# Altium PCB STM32F4Front.PcbDoc
Units mm, origin at the board's own origin, x right, y up, seen from the top; angles counter-clockwise.
Board outline 116.54 x 91.29 mm, 2 copper layers (Top Layer, Bottom Layer); 68 components, 51 nets, 305 pads, 93 vias.
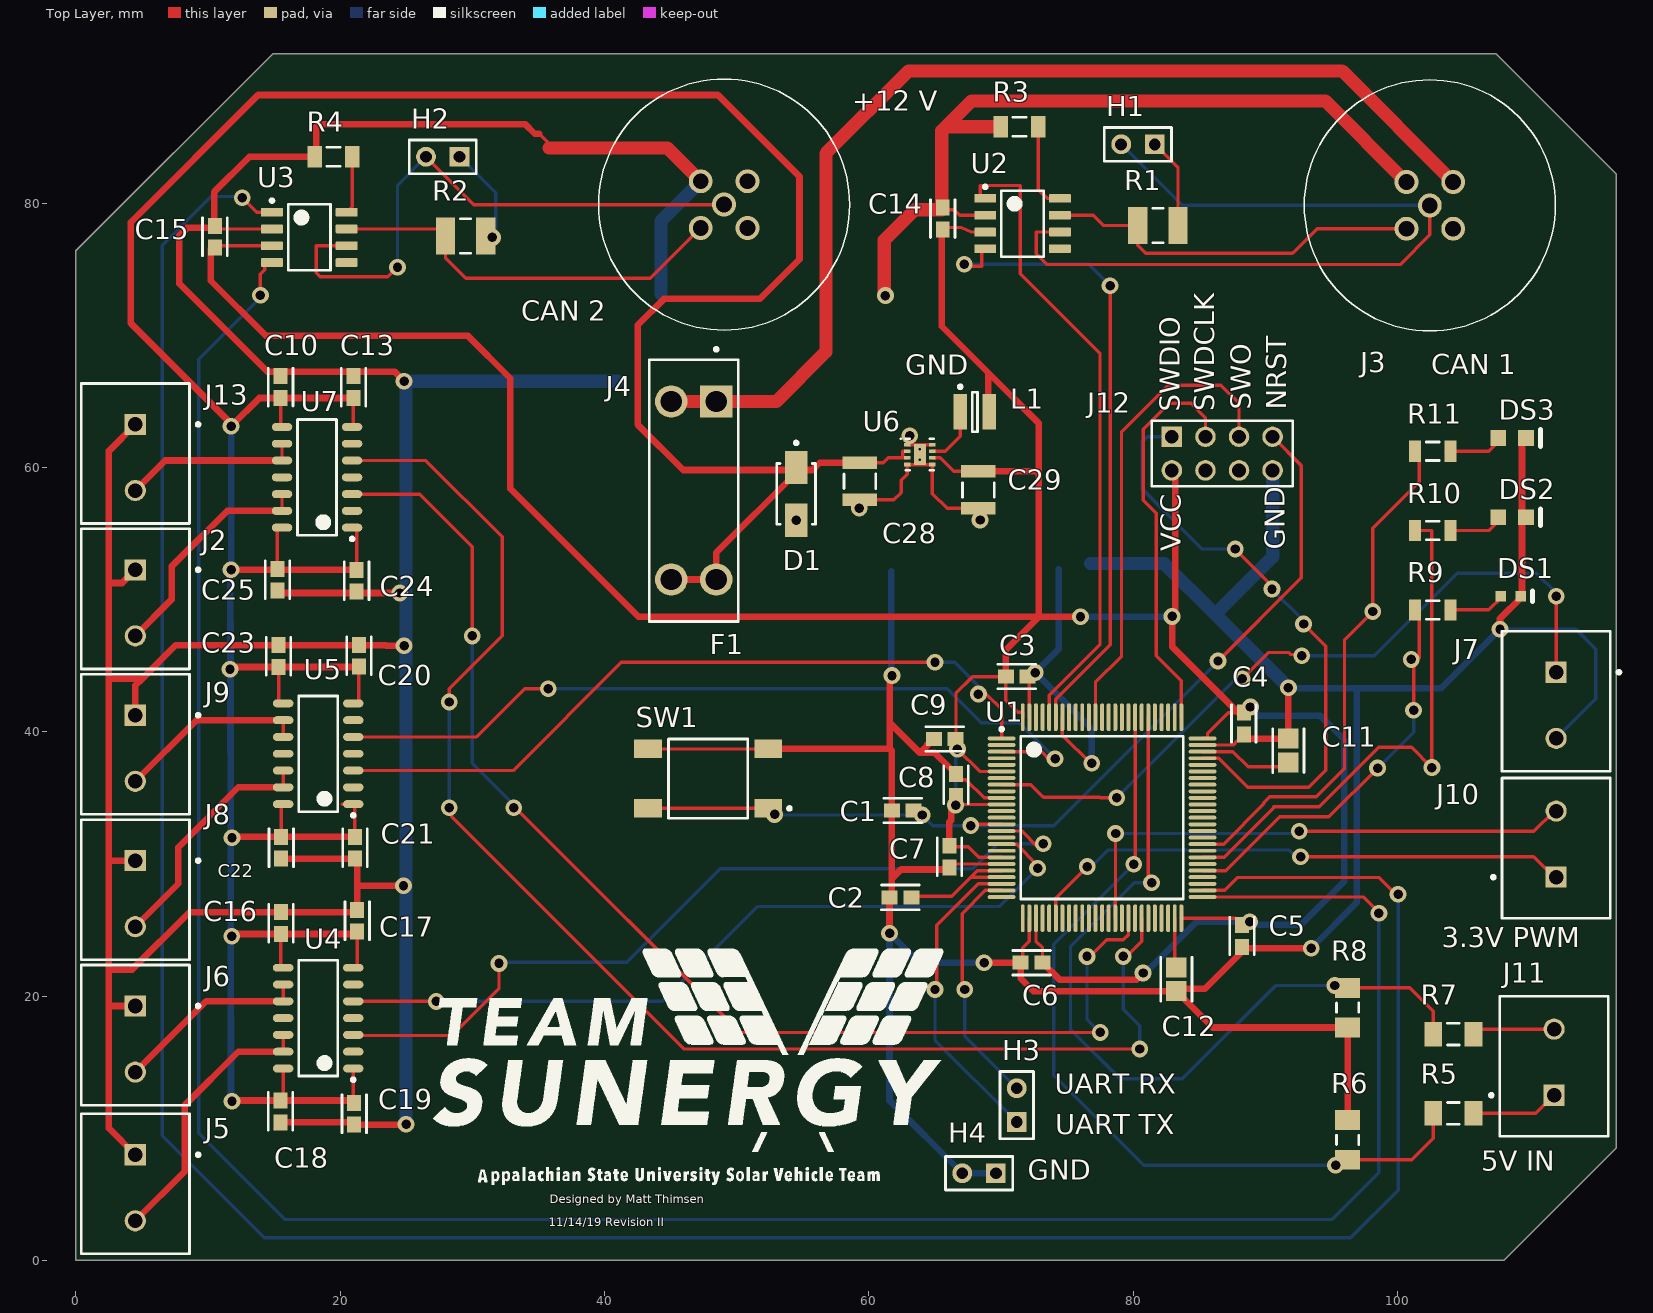
[diagram p0: Top Layer view]
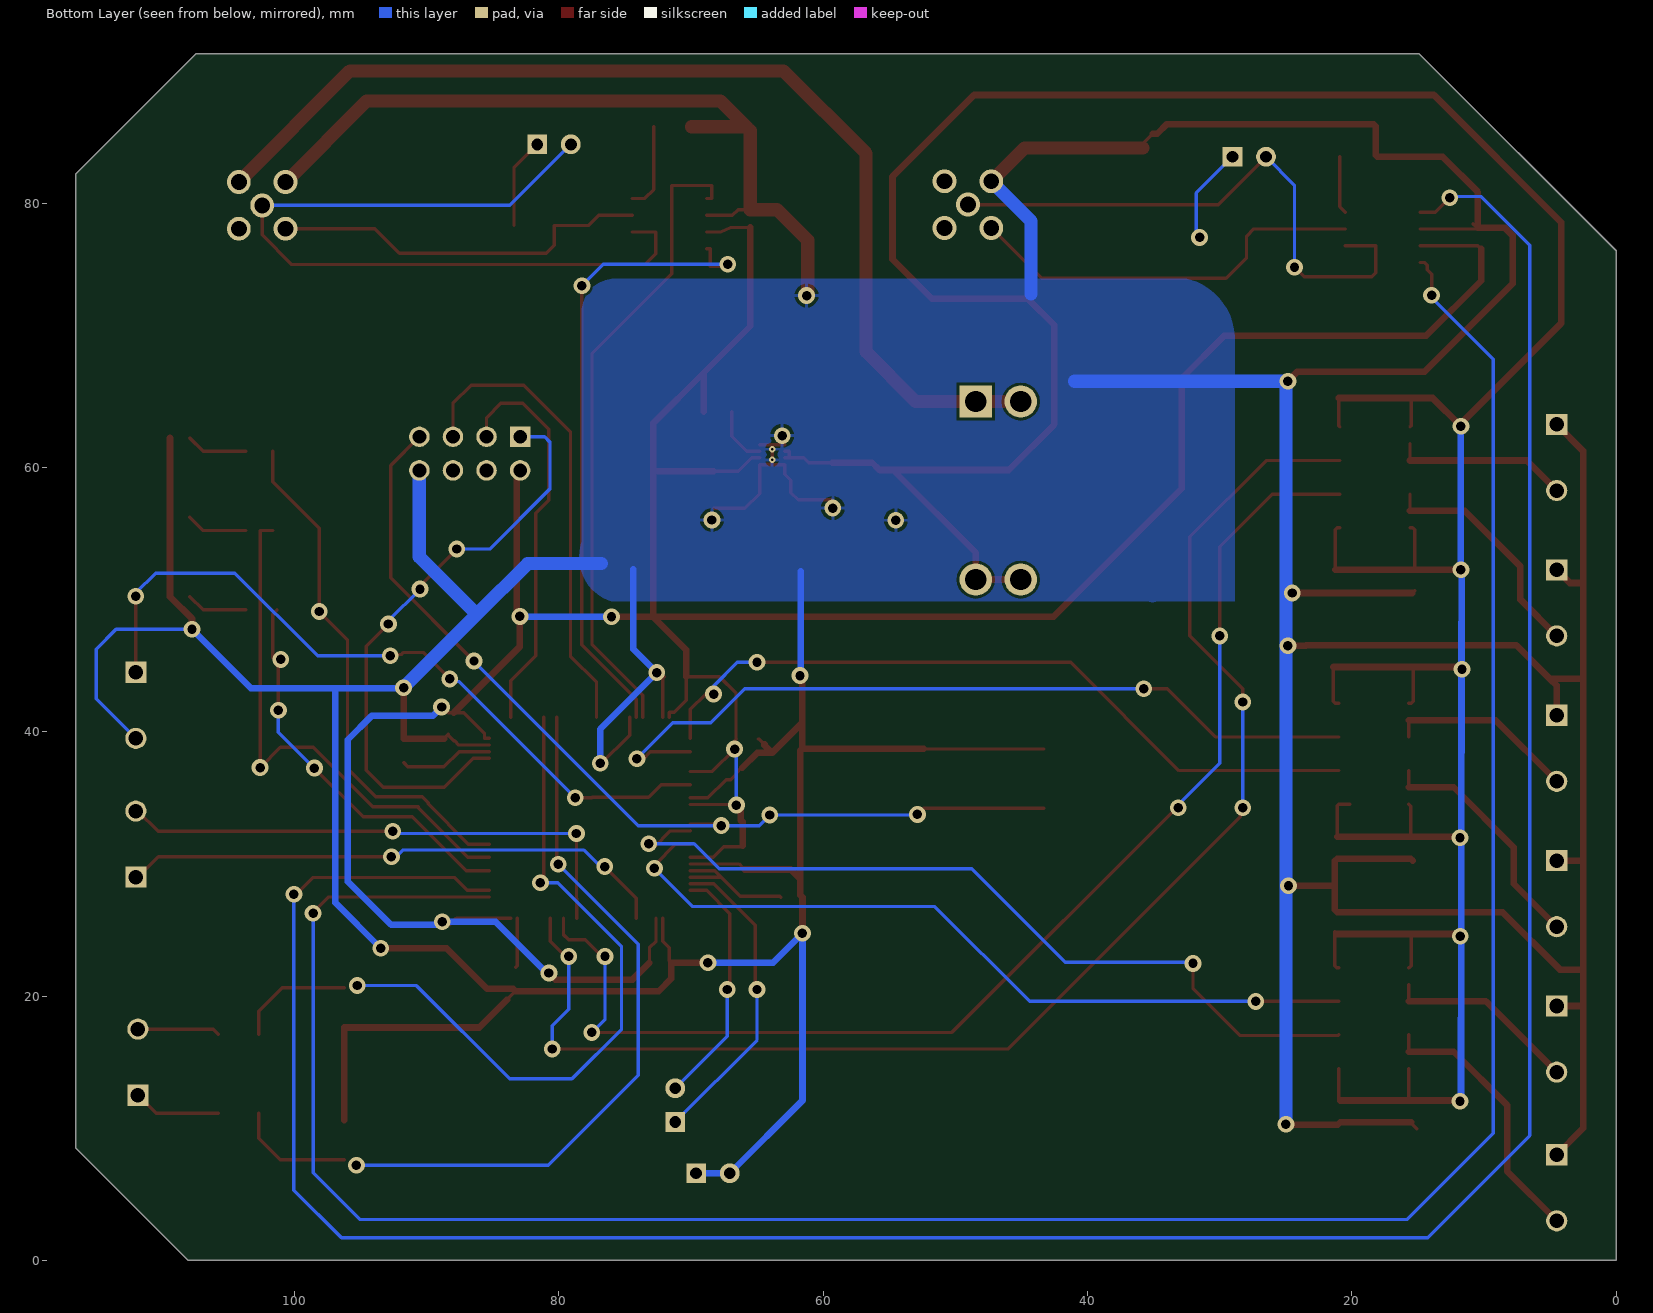
[diagram p1: Bottom Layer view, seen from below]

## Layer stack, top to bottom
Top Solder: solder mask 0.0102, Solder Resist, Dk 3.5
Top Layer: signal copper 0.0356
Dielectric 1: dielectric 0.32, FR-4, Dk 4.8
Bottom Layer: signal copper 0.0356
Bottom Solder: solder mask 0.0102, Solder Resist, Dk 3.5

## Board outline
108.059,0.018 0,0.001 0,76.396 14.924,91.29 107.448,91.29 116.54,82.199 116.54,8.499

## Design rules (kind name [scope] priority, off if disabled: settings)
Clearance [All] p1: gap=0.2 ignorepadtopadclearanceinfootprint=TRUE except(0: Arc-Hole Track-Hole SMDPad-Hole THPad-Hole Via-Hole Fill-Hole Poly-Hole Region-Hole Text-Hole)
MinimumSolderMaskSliver MinimumSolderMaskSliver_1 [HasFootprint('DSG8-1600X900TP') vs HasFootprint('DSG8-1600X900TP')] p1: minsoldermaskwidth=0
MinimumSolderMaskSliver [All] p2: minsoldermaskwidth=0.2
PolygonConnect [All] p1: connectstyle=Relief reliefconductorwidth=0.254 reliefentries=4 polygonreliefangle="90 Angle" airgapwidth=0.254
RoutingVias [All] p1: holewidth=0.711 width=1.27 viastyle="Through Hole" minholewidth=0.711 minwidth=1.27 maxholewidth=0.711 maxwidth=1.27
SilkToSolderMaskClearance [IsPad] p1: minsilkscreentomaskgap=0.2 clearancetoexposedcopper=TRUE
SolderMaskExpansion [All] p1: expansion=0.102
Width [All] p1: maxlimit=1 minlimit=0.254 preferedwidth=0.254 minimp=50.000000 maximp=50.000000 favimp=50.000000
28 further rules are at their usual default settings.

## Classes and differential pairs
component class User_LEDs: DS1 DS2 DS3 R9 R10 R11
component class Power_Supply: C28 C29 L1 U6
component class MCU: C1 "C1 0.1 uF" C2 C3 C4 C5 "C5 100nF" C6 "C6 100nF" C7 "C7 100nF" C8 "C8 0.1uF" C9 "C9 0.1uF" "C10 0.1uF" C11 C12 SW1 U1
component class Communications: C14 C15 D1 F1 H1 H2 H3 H4 J4 J12 R1 R2 R3 R4 U2 U3
component class 12v_Outputs: C10 C13 C16 C17 C18 C19 C20 C21 C22 C23 C24 C25 J2 J5 J6 J7 J8 J9 J10 J13 U4 U5 U7
component class 5v_Inputs: J11 R5 R6 R7 R8

## Components (designator, comment, footprint, x,y, rotation, side; value= is the part's Value field where it differs from the comment)
C1 "100nF" Kemet_C0603_IPC_A 62.565,34.049 r180 top
C2 "100nF" Kemet_C0603_IPC_A 62.39,27.474 r0 top
C3 "100nF" Kemet_C0603_IPC_A 71.19,44.174 r0 top
C4 "100nF" Kemet_C0603_IPC_A 88.365,40.624 r270 top
C5 "100nF" Kemet_C0603_IPC_A 88.24,24.549 r270 top
C6 "100nF" Kemet_C0603_IPC_A 72.315,22.524 r0 top
C7 "100nF" Kemet_C0603_IPC_A 66.09,30.549 r90 top
C8 "100nF" Kemet_C0603_IPC_A 66.59,35.974 r270 top
C9 "100nF" Kemet_C0603_IPC_A 65.74,39.449 r0 top
C10 "100nF" Kemet_C0603_IPC_A 15.5,66.076 r90 top
C11 "2.2uF" Yageo_CC0805-0.85_IPC_A 91.74,38.574 r270 top
C12 "2.2uF" Yageo_CC0805-0.85_IPC_A 83.265,21.274 r90 top
C13 "100nF" Kemet_C0603_IPC_A 21,66.076 r90 top
C14 "100nF" Kemet_C0603_IPC_A 65.59,78.824 r90 top
C15 "100nF" Kemet_C0603_IPC_A 10.515,77.449 r90 top
C16 "100nF" Kemet_C0603_IPC_A 15.515,25.524 r90 top
C17 "100nF" Kemet_C0603_IPC_A 21.29,25.699 r90 top
C18 "100nF" Kemet_C0603_IPC_A 15.49,11.274 r270 top
C19 "100nF" Kemet_C0603_IPC_A 21.065,11.099 r270 top
C20 "100nF" Kemet_C0603_IPC_A 21.415,45.749 r90 top
C21 "100nF" Kemet_C0603_IPC_A 21.115,31.224 r270 top
C22 "100nF" Kemet_C0603_IPC_A 15.54,31.224 r270 top
C23 "100nF" Kemet_C0603_IPC_A 15.34,45.724 r90 top
C24 "100nF" Kemet_C0603_IPC_A 21.25,51.424 r270 top
C25 "100nF" Kemet_C0603_IPC_A 15.25,51.5 r270 top
C28 "CAP 22uF 16V X7R 1210(3225)" CAPC1210(3225)280_L 59.315,58.949 r90 top value=22uF
C29 "CAP 22uF 16V X7R 1210(3225)" CAPC1210(3225)280_L 68.28,58.299 r90 top value=22uF
D1 "S1J-13-F" Diodes_SMA_0 54.5,58 r270 top
DS1 "HSMS-C190" AVAG-HSMX-C190_V 108.565,50.249 r0 top
DS2 "HSMD-C170" AVAG-HSMX-C170_V 108.665,56.224 r0 top
DS3 "HSMG-C170" AVAG-HSMX-C170_V 108.665,62.224 r0 top
F1 "3557-2" Keystone_3557-2_0 46.75,58.25 r270 top
H1 "Header 0" HDR1X2 81.629,84.444 r180 top
H2 "Header 0" HDR1X2 29.03,83.499 r180 top
H3 "Header 0" HDR1X2 71.19,10.484 r90 top
H4 "Header 0" HDR1X2 69.605,6.599 r180 top
J2 "282836-2" TECO-282836-2_V 4.5,49.75 r270 top
J3 "1542761" 1542761 102.44,79.824 r135 top
J4 "1542761" 1542761 49.047,79.881 r135 top
J5 "282836-2" TECO-282836-2_V 4.5,5.5 r270 top
J6 "282836-2" TECO-282836-2_V 4.5,16.75 r270 top
J7 "282836-2" TECO-282836-2_V 112,42 r270 top
J8 "282836-2" TECO-282836-2_V 4.5,27.75 r270 top
J9 "282836-2" TECO-282836-2_V 4.5,38.75 r270 top
J10 "282836-2" TECO-282836-2_V 112,31.5 r90 top
J11 "282836-2" TECO-282836-2_V 111.84,14.999 r90 top
J12 "SSW-104-02-T-D" SMTC-SSW-104-02-X-D 82.925,62.314 r0 top
J13 "282836-2" TECO-282836-2_V 4.5,60.75 r270 top
L1 "SRN3015-2R2M" BOUR-SRN3015-2_V 68.015,64.199 r0 top
R1 "ERJ-14YJ121U" RESC3225X70X50ML20T20 81.865,78.299 r0 top
R2 "ERJ-14YJ121U" RESC3225X70X50ML20T20 29.49,77.499 r0 top
R3 "ERJ-8GEYJ103V" RESC3216X70X50NL05T20 71.39,85.774 r180 top
R4 "ERJ-8GEYJ103V" RESC3216X70X50NL05T20 19.49,83.499 r180 top
R5 "4.7 kOhm" RESC3216X60X45ML15T20 104.226,11.124 r180 top
R6 "ERA8AEB912V" RESC3216X70X50ML20T25 96.226,9.124 r270 top
R7 "4.7 kOhm" RESC3216X60X45ML15T20 104.226,17.124 r180 top
R8 "ERA8AEB912V" RESC3216X70X50ML20T25 96.226,19.124 r270 top
R9 "CRCW120656R0FKEA" RESC3216X60X45LL10T20 102.665,49.224 r180 top
R10 "CRCW120656R0FKEA" RESC3216X60X45LL10T20 102.665,55.224 r180 top
R11 "CRCW120656R0FKEA" RESC3216X60X45LL10T20 102.665,61.224 r180 top
SW1 "TL3301AF260QG" ESWI-TL3301AF260QG_V 47.84,36.449 r180 top
U1 "STM32F407VGT6" STM-LQFP100_M 77.643,33.496 r0 top
U2 "SN65HVD230D" D0008A_M 71.629,78.444 r0 top
U3 "SN65HVD230D" D0008A_M 17.665,77.404 r0 top
U4 "BTS4160DGA" INF-PG-DSO-14-37_N 18.34,18.334 r180 top
U5 "BTS4160DGA" INF-PG-DSO-14-37_N 18.34,38.334 r180 top
U6 "TPS62172DSGR" DSG8-1600X900TP 63.856,60.971 r0 top
U7 "BTS4160DGA" INF-PG-DSO-14-37_N 18.25,59.25 r180 top

## Footprints (in the part's own frame and the unit in brackets; to place one, negate y for a bottom-side part, rotate by r counter-clockwise, add the part's x,y. Pads: shape width x height; smd on the part's side, far side on the other; paste and mask are expansions set on the pad)
1542761 [mm]
  round 1.8 hole 1.2: 1(-2.5,0) 2(0,-2.5) 3(2.5,0) 4(0,2.5) 5(0,0)
  silkscreen extent -9.5,-9.5 9.5,9.5
AVAG-HSMX-C170_V [mm] "SMD, 2-Leads, Body 2x1.25mm, Height 0.8mm"
  rect 1.2x1.2 smd: 1(-1.05,0) 2(1.05,0)
  silkscreen extent 2.15,-0.63 2.15,0.63, body extent -1,-0.63 1,0.63, height 0.8
AVAG-HSMX-C190_V [mm] "SMD, 2-Leads, Body 1.6x0.8mm, Height 0.9mm"
  rect 0.8x0.8 smd: 1(-0.75,0) 2(0.75,0)
  silkscreen extent 1.65,-0.4 1.65,0.4, body extent -0.8,-0.4 0.8,0.4, height 0.9
BOUR-SRN3015-2_V [mm] "SMD, 2-Leads, Body 3x3mm, Height 1.5mm"
  rect 1x2.7 smd: 1(-1.1,0) 2(1.1,0)
  silkscreen extent -1.22,-1.5 0.2,2.02, body extent -1.5,-1.5 1.5,1.5, height 1.5
CAPC1210(3225)280_L [mm] "Chip Capacitor, Body 3.2x2.5mm, Height 2.8mm, IPC High Density"
  rect 0.95x2.6 smd: 1(-1.4,0) 2(1.4,0)
  silkscreen extent -0.55,-1.2 0.55,1.2, body extent -1.7,-1.4 1.7,1.4, height 2.8
D0008A_M [mm] "SOIC, 8-Leads, Body 5x4mm, Pitch 1.27mm, IPC Low Density"
  rrect15% 1.65x0.65 smd: 1(-2.825,1.905) 2(-2.825,0.635) 3(-2.825,-0.635) 4(-2.825,-1.905) 5(2.825,-1.905) 6(2.825,-0.635) 7(2.825,0.635) 8(2.825,1.905)
  silkscreen extent -2.95,-2.5 1.6,2.9, body extent -3,-2.45 3,2.45, height 1.63
Diodes_SMA_0 [mm]
  rect 2.5x1.7 smd paste+0 mask+0: 1(-2,0) 2(2,0)
  silkscreen extent -3.97,-1.46 2.3,1.46, body extent -3.35,-1.56 3.35,1.56, height 0.25
DSG8-1600X900TP [mm] "SON, 8-Leads, Body 2x2mm, Pitch 0.5mm, Thermal Pad 1.6x0.9mm, TI Recommended"
  rect 0.5x0.28 smd paste-0.14 mask+0.07: 1(-0.95,0.75) 2(-0.95,0.25) 3(-0.95,-0.25) 4(-0.95,-0.75) 5(0.95,-0.75) 6(0.95,-0.25) 7(0.95,0.25) 8(0.95,0.75)
  rect 0.9x1.6 smd paste-0.45 mask+0.07: 9(0,0)
  silkscreen extent -1.5,-1.2 1.05,1.25, body extent -1.05,-1.05 1.05,1.05, height 0.8
ESWI-TL3301AF260QG_V [mm] "SMD, 4-Leads, Body 6x6mm"
  rect 2.1x1.4 smd: 1(-4.55,2.25) 2(4.55,2.25) 3(-4.55,-2.25) 4(4.55,-2.25)
  silkscreen extent -6.27,-3 3,3, body extent -3,-3 3,3, height 5.3
HDR1X2 [mm] "Connector; Header; 2 Position"
  rect 1.5x1.5 hole 0.9: 1(0,0)
  round 1.5 hole 0.9: 2(2.54,0)
  silkscreen extent -1.27,-1.27 3.81,1.27
INF-PG-DSO-14-37_N [mm] "SOP, 14-Leads, Body 8.65x3.9mm, Pitch 1.27mm, IPC Medium Density"
  oval 1.55x0.6 smd: 1(-2.65,3.81) 2(-2.65,2.54) 3(-2.65,1.27) 4(-2.65,0) 5(-2.65,-1.27) 6(-2.65,-2.54) 7(-2.65,-3.81) 8(2.65,-3.81) 9(2.65,-2.54) 10(2.65,-1.27) 11(2.65,0) 12(2.65,1.27) 13(2.65,2.54) 14(2.65,3.81)
  silkscreen extent -2.78,-4.37 1.47,4.78, body extent -2,-4.38 2,4.38, height 1.75
Kemet_C0603_IPC_A [mm]
  rect 1.206x1.058 smd paste+0 mask+0: 1(-0.826,0) 2(0.826,0)
  silkscreen extent -1.43,-0.93 1.43,0.93
Keystone_3557-2_0 [mm]
  rect 2.45x2.45 hole 1.6 paste-1000 mask+0: 1(-6.735,1.7)
  round 2.45 hole 1.6 paste-1000 mask+0: 2(6.735,1.7) 3(-6.735,-1.7) 4(6.735,-1.7)
  silkscreen extent -10.8,-3.36 9.9,3.36, body extent -10.08,-3.54 10.08,3.54, height 0.25
RESC3216X60X45LL10T20 [mm] "Chip Resistor, 2-Leads, Body 3.20x1.60mm, IPC High Density"
  rect 0.9x1.6 smd: 1(-1.35,0) 2(1.35,0)
  silkscreen extent -0.5,-0.7 0.5,0.7, body extent -1.65,-0.85 1.65,0.85, height 0.6
RESC3216X60X45ML15T20 [mm] "Chip Resistor, 2-Leads, Body 3.3x1.75mm, IPC Low Density"
  rect 1.35x1.85 smd: 1(-1.525,0) 2(1.525,0)
  silkscreen extent -0.45,-0.83 0.45,0.82, body extent -1.65,-0.87 1.65,0.87, height 0.6
RESC3216X70X50ML20T25 [mm] "Chip Resistor, 2-Leads, Body 3.20x1.60mm, IPC Low Density"
  rect 1.5x1.9 smd: 1(-1.5,0) 2(1.5,0)
  silkscreen extent -0.35,-0.85 0.35,0.85, body extent -1.7,-0.9 1.7,0.9, height 0.7
RESC3216X70X50NL05T20 [mm] "Chip Resistor, 2-Leads, Body 3.20x1.60mm, IPC Medium Density"
  rect 1.1x1.65 smd: 1(-1.425,0) 2(1.425,0)
  silkscreen extent -0.5,-0.73 0.5,0.73, body extent -1.63,-0.82 1.62,0.82, height 0.7
RESC3225X70X50ML20T20 [mm] "Chip Resistor, 2-Leads, Body 3.20x2.50mm, IPC Low Density"
  rect 1.45x2.8 smd: 1(-1.525,0) 2(1.525,0)
  silkscreen extent -0.4,-1.3 0.4,1.3, body extent -1.7,-1.35 1.7,1.35, height 0.7
SMTC-SSW-104-02-X-D [mm] "SQ Post Socket, 2x4 Pins, Vertical, 2.54mm Pitch, Female"
  rect 1.55x1.55 hole 1.04: 1(0,0)
  round 1.55 hole 1.04: 2(0,-2.54) 3(2.54,0) 4(2.54,-2.54) 5(5.08,0) 6(5.08,-2.54) 7(7.62,0) 8(7.62,-2.54)
  silkscreen extent -1.53,-3.74 9.15,1.2, body extent -1.52,-3.75 9.14,1.21, height 8.51
STM-LQFP100_M [mm] "Thin QFP, 100-Leads, Body 14x14mm, Pitch 0.5mm, IPC Low Density"
  oval 2.1x0.3 smd: 1(-7.6,6) 2(-7.6,5.5) 3(-7.6,5) 4(-7.6,4.5) 5(-7.6,4) 6(-7.6,3.5) 7(-7.6,3) 8(-7.6,2.5) 9(-7.6,2) 10(-7.6,1.5) 11(-7.6,1) 12(-7.6,0.5) 13(-7.6,0) 14(-7.6,-0.5) 15(-7.6,-1) 16(-7.6,-1.5) 17(-7.6,-2) 18(-7.6,-2.5) 19(-7.6,-3) 20(-7.6,-3.5) 21(-7.6,-4) 22(-7.6,-4.5) 23(-7.6,-5) 24(-7.6,-5.5) 25(-7.6,-6) 51(7.6,-6) 52(7.6,-5.5) 53(7.6,-5) 54(7.6,-4.5) 55(7.6,-4) 56(7.6,-3.5) 57(7.6,-3) 58(7.6,-2.5) 59(7.6,-2) 60(7.6,-1.5) 61(7.6,-1) 62(7.6,-0.5) 63(7.6,0) 64(7.6,0.5) 65(7.6,1) 66(7.6,1.5) 67(7.6,2) 68(7.6,2.5) 69(7.6,3) 70(7.6,3.5) 71(7.6,4) 72(7.6,4.5) 73(7.6,5) 74(7.6,5.5) 75(7.6,6)
  oval 0.3x2.1 smd: 26(-6,-7.6) 27(-5.5,-7.6) 28(-5,-7.6) 29(-4.5,-7.6) 30(-4,-7.6) 31(-3.5,-7.6) 32(-3,-7.6) 33(-2.5,-7.6) 34(-2,-7.6) 35(-1.5,-7.6) 36(-1,-7.6) 37(-0.5,-7.6) 38(0,-7.6) 39(0.5,-7.6) 40(1,-7.6) 41(1.5,-7.6) 42(2,-7.6) 43(2.5,-7.6) 44(3,-7.6) 45(3.5,-7.6) 46(4,-7.6) 47(4.5,-7.6) 48(5,-7.6) 49(5.5,-7.6) 50(6,-7.6) 76(6,7.6) 77(5.5,7.6) 78(5,7.6) 79(4.5,7.6) 80(4,7.6) 81(3.5,7.6) 82(3,7.6) 83(2.5,7.6) 84(2,7.6) 85(1.5,7.6) 86(1,7.6) 87(0.5,7.6) 88(0,7.6) 89(-0.5,7.6) 90(-1,7.6) 91(-1.5,7.6) 92(-2,7.6) 93(-2.5,7.6) 94(-3,7.6) 95(-3.5,7.6) 96(-4,7.6) 97(-4.5,7.6) 98(-5,7.6) 99(-5.5,7.6) 100(-6,7.6)
  silkscreen extent -7.72,-6.15 6.15,6.82, body extent -7,-7 7,7, height 1.6
TECO-282836-2_V [mm] "Female Header, Pitch 5mm, 1 x 2 Position, Height 10mm"
  rect 1.6x1.6 hole 1.1: 1(-2.5,0)
  round 1.6 hole 1.1: 2(2.5,0)
  silkscreen extent -5.6,-4.1 5,4.88, body extent -5.6,-4.1 5,4.1, height 10
Yageo_CC0805-0.85_IPC_A [mm]
  rect 1.505x1.556 smd paste+0 mask+0: 1(-0.901,0) 2(0.901,0)
  silkscreen extent -1.65,-1.18 1.65,1.18, body extent -2.15,-1.28 2.15,1.28, height 0.25

## Part data
C1 C2 C3 C4 C5 C6 C7 C8 C9 C10 C13 C14 C15 C16 C17 C18 C19 C20 C21 C22 C23 C24 C25: library part C0603C104K5RACTU, "CAP CER 0.1UF 100NF 50V X7R 0603 C0603C104K5RACTU"
C11 C12: library part CC0805KKX7R6BB225, "2.2UF CC0805KKX7R6BB225"
C28 C29: library part CMP-1038-02277-1, "CAP 22uF 16V ±10% 1210 (3225 Metric) Thickness 2.8mm SMD", Case-EIA=1210, Case-Metric=3225, Rated Voltage="16 V", Tolerance=±10%, Max Thickness="2.8 mm", Technology=SMT
DS1: library part CMP-2000-06427-1, "LED Uni-Color Red, 52 mW, 20 mA, -40 to 85 degC, 2-Pin SMD, RoHS, Tape and Reel", Emitting Color=Red, Forward Current=25mA, Forward Voltage=2.6V, Manufacturer=Avago, Operating Temperature Classification=Industrial, Operating Temp Range=-40Cto85C, Package Description="2-Pin Surface Mount Device, Body 1.6 x 0.8 mm, Height 0.9 mm", Package Reference=HSMX-C190, Package Type=ChipLed, Power Dissipation=52W, Reverse Voltage=5V, Test Current (It)=20mA, Chip Material=GaP, Datasheet URL=http://docs.avagotech.com/docs/AV02-0551EN, Datasheet Version=03/2012, DELETED=Compliant, Dominant Wave Length=626nm, High Brightness=No, Lens Dimensions=1x0.8x0.5mm, Lens Type=ColorlessDiffused, Luminous Intensity=10mcd, Lum Intensity=10mcd, Main Category=ChipLED, Manufacturer URL=http://www.avagotech.com/, Mounting=SurfaceMount, Mounting Technology=SurfaceMount, Number of  Elements=1, Packaging=TapeandReel, Peak Wavelength=630nm, Pin Count=2, Product Depth (mm)=0.8mm, Product Height (mm)=0.8mm, Product Length (mm)=1.6mm, Rad Hardened=No, Shape Type=Rectangular, Type=Uni-Color, Viewing Angle=170deg
DS2: library part CMP-2000-06421-1, "LED Uni-Color Orange, 52 mW, 20 mA, -40 to 85 degC, 2-Pin SMD, RoHS, Tape and Reel", Forward Current If=20mA, Forward Voltage=2.2V, LED Colour=Orange, Manufacturer=Avago, Operating Temperature Max=85°C, Operating Temperature Min=-30°C, Operating Temperature Range=-30°Cto+85°C, Opto Case Style=SMD, Package Description="2-Pin Surface Mount Device, Body 2 x 1.25 mm, Height 0.8 mm", Package Reference=HSMX-C170, Power Dissipation Pd=52mW, Storage Temperature Min=-40°C, Bulb Size=1.25mmx1.4mm, Datasheet URL=http://docs.avagotech.com/docs/AV02-0551EN, Datasheet Version=03/2012, Dominant Wavelength=604nm, External Depth=0.8mm, External Length / Height=2mm, External Width=1.25mm, Forward Current If Max=20mA, Forward Voltage VF Max=2.2V, LED Mounting=SMD, LED Type=Standard, Lens Shape=Rectangular, Light Area Height=1.25mm, Luminous Intensity=8mcd, Luminous Intensity Typ=8mcd, Manufacturer URL=http://www.avagotech.com/, Mounting Technology=SurfaceMount, Mounting Type=SMD, MSL=MSL2A-4weeks, No. of Pins=2, Opto Mounting Orientation=Top, Package / Case=SMD, Peak Forward Current=20mA, Peak Wavelength=605nm, PIV Max=5V, Storage Temperature Max=85°C, SVHC=NoSVHC(19-Dec-2012), Viewing Angle=170°, Voltage Vf Typ=2.2V, Wavelength Typ=605nm
DS3: library part CMP-2000-05062-1, "Chip LED, Green, 2.2 V, -40 to 85 degC, 2-Pin SMD, Pb-Free, Tape and Reel", Forward Current If=20mA, Forward Voltage=2.2V, Forward Voltage VF Max=2.6V, LED Colour=Green, Manufacturer=Avago, Operating Temperature Max=85degC, Operating Temperature Min=-30degC, Operating Temperature Range=-30degCto+85degC, Opto Case Style=SMD, Package Description="2-Pin Surface Mount Device, Body 2 x 1.25 mm, Height 0.8 mm", Package Reference=HSMX-C170, Storage Temperature Min=-40degC, Bulb Size=1.25mmx1.4mm, Datasheet URL=https://datasheet.ciiva.com/29280/180495-da-01-en-chip-led-hsmg-c170-gelb-gruen-29280971.pdf, Datasheet Version=Oct-08, Dominant Wavelength=572nm, Dominant Wavelength Typ=572nm, External Depth=0.8mm, External Length / Height=2mm, External Width=1.25mm, Forward Current If Max=20mA, LED Mounting=SMD, LED Type=Standard, Lens Shape=Rectangular, Light Area Height=1mm, Luminous Intensity=15mcd, Luminous Intensity Min=4mcd, Luminous Intensity Typ=15mcd, Manufacturer URL=http://www.avagotech.com/, Mounting Type=SMD, MSL=MSL2A-4weeks, No. of Pins=2, Opto Mounting Orientation=Top, Packaging=CutTape, Peak Forward Current=20mA, Peak Wavelength=570nm, PIV Max=5V, Storage Temperature Max=85degC, SVHC=NoSVHC(16-Jun-2014), Viewing Angle=170deg, Voltage Vf Typ=2.2V, Wavelength Typ=570nm
H1 H2 H3 H4: library part "Header 2", "Header, 2-Pin", LatestRevisionDate=17-Jul-2002, LatestRevisionNote="Re-released for DXP Platform.", Publisher="Altium Limited"
J2 J5 J6 J7 J8 J9 J10 J11 J13: library part CMP-1684-00017-1, "Female Header, Pitch 5 mm, 1 x 2 Position, Height 10 mm, Tail Length 3.5 mm, Rohs, Bulk", Color=Green, Current=13.5A, Manufacturer="TE Connectivity", Package Description="Female Header, Pitch 5 mm, 1 x 2 Position, Height 10 mm, Tail Length 3.5 mm", Package Reference=THD, Standard Package=300, Voltage=300V, 3D Model=282836-2.pdf, Category=Connectors,Interconnects, Clamp Material - Plating=Brass-NickelPlated, Contact Material - Plating=Brass-TinPlated, Datasheet URL=http://www.te.com.cn/commerce/DocumentDelivery/DDEController?Action=showdoc&DocId=Catalog+Section%7F1308389_EUROSTYLE_TERMINAL_BLOCKS%7F0607%7Fpdf%7FEnglish%7FENG_CS_1308389_EUROSTYLE_TERMINAL_BLOCKS_0607.pdf%7F282836-2, Dynamic Catalog=BuchananSeries, Family=TerminalBlocks-WiretoBoard, Featured Product=EurostyleTerminalBlockConnectors, Features=Interlocking(Side), Housing Material=Polyamide(PA66),Nylon6/6, Manufacturer URL=http://www.te.com, Mating Orientation=HorizontalwithBoard, Mounting Type=ThroughHole, Number of Levels=1, Other Names="5ULV-02B / A98076", Packaging=Bulk, Pitch="0.197\"(5.00mm)", Positions Per Level=2, Product Training Modules=Wire-to-BoardEurostyleTerminalBlocks, RoHS Information=282836-2StatementofCompliance, Screw Material - Plating=Brass-NickelPlated, Screw Thread=M3, Series=Buchanan, Torque - Screw=0.68Nm(6Lb-In), Wire Gauge=16-30AWG, Wire Termination=Screw-RisingCageClamp
J3 J4: "Connector", Manufacturer_Name="Phoenix Contact", Mouser Part Number=651-1542761, RS Part Number=8025583, Allied_Number=70170366, Allied Price/Stock=https://www.alliedelec.com/phoenixcontact-1542761/70170366/, Datasheet Link=https://media.digikey.com/PDF/Data%20Sheets/Phoenix%20Contact%20PDFs/1542761.pdf, Height=18mm, Manufacturer_Part_Number=1542761, Mouser Price/Stock=https://www.mouser.com/Search/Refine.aspx?Keyword=651-1542761, RS Price/Stock=http://uk.rs-online.com/web/p/products/8025583
J12: library part CMP-1023-00342-1, "SQ Post Socket, Through-hole, Vertical, -55 to 105 degC, 2.54mm Pitch, 8-Pin, Female, RoHS", Manufacturer=Samtec, Temperature Range="-55 to 105 degC", ComponentLink1Description="Manufacturer URL", ComponentLink1URL=http://www.samtec.com, ComponentLink2Description=Datasheet, ComponentLink2URL=http://www.samtec.com/documents/webfiles/pdf/SSW_TH.PDF, ComponentLink3Description="Package Specification", ComponentLink3URL=http://www.samtec.com/documents/webfiles/cpdf/SSW-1XX-XX-XXX-X-XX-XXX-XX-MKT.pdf, DatasheetVersion=F-214, Mounting Technology=Through-hole, Orientation=Vertical, PackageDescription="Assembly, Socket Strip .016 X .031 Tail", PackageReference=SSW-104-02-X-D, PackageVersion="CA, 6/1987", PartNumber=SSW-104-02-T-D, Pitch="2.54 mm", RoHS=True
L1: library part CMP-0007-00003-1, "Semi-shielded Power Inductor, 2.2 uH, +/- 20%, 1.8 A, -40 to 125 degC, 3 x 3 x 1.5 mm SMD, RoHS and Halogen Free, Tape and Reel", Inductance="2.2 uH", Inductance tolerance="+/- 20%", Manufacturer=Bourns, Operating Temperature="-40 to 125 degC", Rated current="1.8 A", Resistance to Solder Heat="+260 degC for 10 sec.", ComponentLink1Description="Manufacturer URL", ComponentLink1URL=http://www.bourns.com/, ComponentLink2Description=Datasheet, ComponentLink2URL=http://www.bourns.com/data/global/pdfs/SRN3015.pdf, ComponentLink3Description="Package Specification", ComponentLink3URL=http://www.bourns.com/data/global/pdfs/SRN3015.pdf, DatasheetVersion=Aug-11, DCR Max="0.072 Ohm", Isat="1.65 A", Mounting Technology="Surface Mount", PackageDescription="2-Pin SMD, Body 3 x 3 mm, Height 1.5 mm", PackageReference=SRN3015, Packing="Tape and Reel", PartNumber=SRN3015-2R2M, RoHS=TRUE, SRF Min="90 MHz"
R1 R2: library part CMP-2005-03490-1, "120Ohm", Manufacturer=Panasonic, Part Number=ERJ-14YJ121U
R3 R4: library part CMP-2003-00545-1, "10k", Manufacturer=Panasonic, Part Number=ERJ-8GEYJ103V
R5 R7: library part CMP-2100-03618-1, "Chip Resistor, 4.7 KOhm, +/- 1%, 0.25 W, -55 to 155 degC, 1206 (3216 Metric), RoHS, Tape and Reel", Case/Package=1206, Case Code (Metric)=3216, Manufacturer="Vishay Semiconductor", Max Operating Temperature=155degC, Max Power Dissipation=250mW, Min Operating Temperature=-55degC, Package Description="2-Pin Surface Mount Device, Body 3.15 x 1.6 mm", Package Quantity=10, Package Reference=1206.0, Resistance=4.7KOhm, Temperature Coefficient=100ppm/degreesC, Tolerance=1%, Voltage Rating=200V, Case Code (Imperial)=1206, Composition=ThickFilm, Contact Plating=Tin, Datasheet URL=http://www.vishay.com/docs/20035/dcrcwe3.pdf, Datasheet Version=41061.0, Depth=1.6mm, Height=0.55mm, Lead Free=LeadFree, Length=3.2mm, Manufacturer URL=http://www.vishay.com/, Military Standard=Not, Mount=SurfaceMount, Number of Terminations=2, Packaging=TapeandReel, Power Rating=250mW, Radiation Hardening=No, REACH SVHC=Unknown, RoHSCompliant=true, Termination=SMD/SMT, Voltage Rating (DC)=200V, Weight=0.000353oz, Width=1.6mm
R6 R8: library part CMP-2003-00013-1, Manufacturer=Panasonic, Part Number=ERA8AEB912V
R9 R10 R11: library part CMP-2003-02285-1, Manufacturer="Vishay Dale", Part Number=CRCW120656R0FKEA
SW1: library part CMP-2000-07249-1, "Tactile Switch, SPST-NO, 50 mA, 12 V, -20 to 70 degC, 4-Pin SMD, RoHS, Tape and Reel", Contact Rating @ Voltage=0.05A@12VDC, Illumination Type, Color=-, Manufacturer=E-Switch, Operating Force=260gf, Operating Temperature=-20°C~70°C, Package Description="4-Pin Surface Mount Device, Body 6 x 6 mm", Package Version="Rev. D, 10/2014", Standard Package=1, 3D Model=TL3301AFyyyyG.stp, Actuator Height off PCB, from Pins=5.00mm, Actuator Material=Polyamide(PA),Nylon, Actuator Orientation=TopActuated, Actuator Type=Standard, Catalog Drawings=TL3301xFFootprint, Category=Switches, Circuit=SPST-NO, Datasheet URL=https://www.e-switch.com/system/asset/product_line/data_sheet/185/TL3301.pdf, Datasheet Version=12/2013, Family=TactileSwitches, Featured Product=TL3301SeriesTactSwitch, Features=-, Illumination=Non-Illuminated, Illumination Voltage (Nominal)=-, Ingress Protection=-, Manufacturer URL=http://www.e-switch.ch/en/, Mechanical Life=100,000Cycles, Mounting Technology=SurfaceMount, Mounting Type=SurfaceMount, Online Catalog=TL3301Series, Other Names=EG2527DKR, Outline=6.00mmx6.00mm, Package Reference=TL3301AF260QG, Package URL=http://spec_sheets.e-switch.com/specs/P010513.pdf, Packaging=Digi-Reel®, Product Training Modules=SwitchBasics, RoHS Information=TL3301SeriesRoHSCertofCompliance, Series=TL3301, Switch Function=Off-Mom, Switch Travel=0.25mm, Termination Style=GullWing
U1: library part CMP-0243-00017-3, "ARM Cortex-M4 32-bit MCU+FPU, 210 DMIPS, 1024 kB Flash, 192 kB Internal RAM, 82 I/Os, 100-pin LQFP, -40 to 85 degC, Tray", I/Os (High Current)=82, Manufacturer=STMicroelectronics, Operating Frequency(F) (Processor speed) (MHz)=168, Supply Voltage(Vcc) max (V)=3.6, Supply Voltage(Vcc) min (V)=1.8, ComponentLink1Description="Manufacturer URL", ComponentLink1URL=http://www.st.com/web/en/home.html, ComponentLink2Description=Datasheet, ComponentLink2URL=http://www.st.com/st-web-ui/static/active/en/resource/technical/document/datasheet/DM00037051.pdf, ComponentLink3Description="Package Specification", ComponentLink3URL=http://www.st.com/st-web-ui/static/active/en/resource/technical/document/data_brief/DM00071938.pdf, Core="ARM Cortex-M4", D/A Converter=2x12-bit, DatasheetVersion="Rev. 4", FLASH Size (Prog) (kB)=1024, Internal RAM Size (kB)=192, Mounting Technology="Surface Mount", PackageDescription="100-Pin Low Profile Quad Flat Package, 14 x 14 mm Body, 0.5 mm Pitch", PackageReference=LQFP100, PackageVersion="Rev. 1, 06/2013", Packing=Tray, PartNumber=STM32F407VGT6
U2 U3: library part CMP-0315-00046-3, "CAN Bus Transceiver, 3.3 V, -40 to 85 degC, 8-Pin SOIC (D), Green (RoHS & no Sb/Br), Tube", Generic Part Number=SN65HVD230, Supply Voltage Max="3.6 V", Supply Voltage Min="3 V", Temperature Max="85 degC", Temperature Min="-40 degC", ComponentLink1Description="Manufacturer URL", ComponentLink1URL=http://www.ti.com/, ComponentLink2Description=Datasheet, ComponentLink2URL="http://www.ti.com/general/docs/lit/getliterature.tsp?genericGeneric Part Number=SN65HVD230&fileType=pdf", DatasheetVersion=SLOS346N, Mounting Technology="Surface Mount", PackageDescription="8-Pin Plastic Small Outline, Body 4.9 x 3.9 mm, Pitch 1.27 mm", Packing=Tube, PartNumber=SN65HVD230D, RoHS=TRUE
U4 U5 U7: "Smart High-Side Power Switch, 2 Channels, 1.7 A Load Current, -40 to 150 degC, PG-DSO-14-37, Reel, Green", Load Current (typ)="1.7 A", Manufacturer=Infineon, Recommended Operating Voltage Max.="20 V", Recommended Operating Voltage Min.="5.5 V", Channels=2, ComponentLink1Description="Manufacturer URL", ComponentLink1URL=http://www.infineon.com/, ComponentLink2Description=Datasheet, ComponentLink2URL=http://www.infineon.com/dgdl/BTS+4160DGA_DS2008_03_18_neu.pdf?folderId=db3a304314dca389011537739e37155f&fileId=db3a30431a5c32f2011a957ab5875685&sId=db3a30433d68e984013d7cba76cc57cb, ComponentLink3Description="Package Specification", ComponentLink3URL=http://www.infineon.com/dgdl/BTS723GWDS11_2007_09_25.pdf?folderId=db3a304314dca389011537739e37155f&fileId=db3a304331c8f8560131dbfec21b0da9&sId=db3a30443d67b5ca013d854df2f133e5, DatasheetVersion="Rev. 1.0", Green=TRUE, Group="Automotive Qualified", Halogen-free=TRUE, Mounting Technology="Surface Mount", PackageDescription="14-Pin Plastic (Green) Dual Small Outline Package, 8.65 x 3.9 mm Body, 1.27 mm Pitch", PackageReference=PG-DSO-14-37, PackageVersion=Sep-07, Packing=Reel, PartNumber=BTS4160DGA, Ptot (max)="1.4 W", RON(max) @ 150degreesC="320 mOhm", RON @ 25degreesC="160 mOhm", toff (max)="270 us", ton (max)="250 us"
U6: "Buck Step Down Regulator with 3 to 17 V Input and 3.3 V Output, -40 to 85 degC, 8-Pin WSON (DSG), Green (RoHS & no Sb/Br)", Manufacturer="Texas Instruments", Rating=Catalog, Switch Current Limit(Typ)(A)=1.05, Code_JEDEC=MO-229, ComponentLink1Description=Datasheet, ComponentLink1URL=http://www.ti.com/general/docs/lit/getliterature.tsp?genericPartNumber=TPS62172&fileType=pdf, ComponentLink2Description="Package Specification", ComponentLink2URL=http://www.ti.com/litv/pdf/mpds308a, ComponentLink3Description="URL Link1", ComponentLink3URL="Samples URL:http://www.ti.com/product/tps62172#samples", DatasheetVersion=SLVSAT8A, Duty Cycle(Max)(%)=100, Eco-Plan="Green (RoHS & no Sb/Br)", Iout(Max)(A)=0.5, Iq(Typ)(mA)=0.017, Mounting Technology="Surface Mount", PackageDescription="8-Pin Plastic Small Outline No-Lead, 2 x 2 x 0.8 mm Body, 0.5 mm Pitch, Exposed Pad", PackageReference=DSG8-1600X900TP, PackageVersion="revB, Oct-2010", PartNumber=TPS62172DSGR, Preset Vout(V)=3.3, Regulated Outputs(#)=1, SubFamily="Step-Down Regulator", Synchronous Rectification=TRUE, Topology=Buck, Vin(Max)(V)=17, Vin(Min)(V)=3, Vout(Max)(V)=3.3, Vout(Min)(V)=3.3

## Via types
v1: diameter 1.27, hole 0.711, Top Layer to Bottom Layer, 81 vias
v2: diameter 1.8, hole 1.2, Top Layer to Bottom Layer, 10 vias
v3: diameter 0.5, hole 0.2, Top Layer to Bottom Layer, 2 vias

## Nets (pads, with @x,y where several pads share a name; then routed paths per layer and width w, separated by ;. In a path a pad name is that pad's centre, name@x,y a point inside that pad or via, vN(x,y) a via of type N, cw(c..) or ccw(c..) an arc to the next point about the centre after c; other vN are vias at no path point)
+12: C10.1 C13.1 C16.1 C17.1 C18.1 C19.1 C20.1 C21.1 C22.1 C23.1 C24.1 C25.1 C28.2 D1.1 F1.2 F1.4 U4.1 U4.7 U4.8 U4.14 U5.1 U5.7 U5.8 U5.14 U6.2 U6.3 U7.1 U7.7 U7.8 U7.14 | length 283.2
  Top Layer w0.254: v1(11.665,44.724) v1@11.839,44.898 ; v1(11.79,24.524) v1@11.964,24.698 ; v1(11.815,12.049) v1@11.866,12.1 ; v1(11.815,31.974) v1@11.891,32.05 ; C25.1 15.25,55.28 15.41,55.44 U7.14 ; C23.1 15.34,42.304 15.5,42.144 U5.8 ; C18.1 15.69,12.3 U4.14 ; C10.1 15.5,63.16 U7.8 ; C16.1 15.515,22.304 15.675,22.144 U4.8 ; C22.1 15.54,34.374 U5.14 ; 20.148,34.524 U5.1 21.115,34.399 C21.1 ; C19.1@20.89,12.1 20.99,12.2 U4.1 ; U7.1 21.09,55.44 21.25,55.28 C24.1 ; U7.7 21,63.16 C13.1 ; U4.7 21.13,22.144 21.29,22.304 C17.1 C17.1@21.115,24.698 ; U5.7 21.255,42.144 21.415,42.304 C20.1 C20.1@21.39,44.898 ; D1.1@54.5,59.6 D1.1@54.5,59.8 ; C28.2 61.09,60.349 61.462,60.721 62.566,60.721 ; U6.3 62.566,60.721 ; U6.2 62.566,61.221 62.566,60.721
  Top Layer w0.5: v1(11.75,52.25) C24.1 ; v1@11.839,44.898 C23.1 C20.1@21.39,44.898 ; v1@11.866,12.1 C18.1 C19.1@20.89,12.1 ; v1@11.891,32.05 C22.1 C21.1 ; v1@11.964,24.698 C16.1 C17.1@21.115,24.698 ; C13.1 C10.1 13.89,65.25 v1(11.75,63.11) 11.75,63.314 4.165,70.899 4.165,78.549 13.79,88.174 48.576,88.174 54.75,82 54.75,75.75 51.75,72.75 44.5,72.75 42.5,70.75 42.5,63.25 45.95,59.8 54.5,59.8 55.731,59.8 56.28,60.349 C28.2 ; F1.4 F1.2 48.45,53.55 D1.1@54.5,59.6
  Bottom Layer w0.5: v1@11.74,12.349 11.724,24.524 11.715,31.974 11.699,44.724 11.69,52.049 11.75,52.109 v1(11.75,52.25) v1(11.75,63.11)
GND: C1.2 C2.1 C3.2 C4.2 C5.2 C6.1 C7.1 C8.1 C9.1 C10.2 C11.1 C12.1 C13.2 C14.2 C15.2 C16.2 C17.2 C18.2 C19.2 C20.2 C21.2 C22.2 C23.2 C24.2 C25.2 C28.1 C29.1 D1.2 DS1.2 DS2.2 DS3.2 H4.1 H4.2 J2.1 J3.3 J4.3 J5.1 J6.1 J7.2 J8.1 J9.1 J12.8 J13.1 R3.2 R4.2 R6.1 R8.2 SW1.3 SW1.4 U1.10 U1.20 U1.27 U1.74 U1.94 U1.99 U2.2 U3.2 U6.1 U6.4 U6.5 U6.8 U6.9 | length 669.5
  Top Layer w0.254: C15.2@10.838,78.447 10.515,78.124 10.465,78.124 10.55,78.039 U3.2 ; C18.2@15.088,9.972 15.49,10.374 C18.2 ; C25.2 C25.2@15.424,50.5 ; R4.2 R4.2@18.19,83.624 ; 18.19,85.825 18.339,85.974 ; C19.2@20.89,10.448 C19.2 ; C17.2@21.115,26.35 C17.2 ; C21.2 C21.2@21.29,30.223 ; 21.29,28.374 21.34,28.424 ; C20.2@21.29,46.65 C20.2@21.39,46.55 ; v1@24.964,10.273 v1(24.99,10.299) ; 35.067,85.239 35.79,84.516 35.79,84.174 ; SW1.4 SW1.3 ; C28.1 61.89,57.549 62.439,58.098 62.439,59.023 62.896,59.48 U6.4@62.896,60.196 ; v1@61.564,24.75 v1(61.565,24.749) ; C2.1 C2.1@61.739,27.649 ; U6.4 62.896,60.221 U6.4@62.896,60.196 ; U6.1 U6.9@63.856,61.721 ; C9.1@64.438,39.047 64.84,39.449 C9.1 ; U6.8 U6.9@63.856,61.721 ; C14.2@65.515,79.499 66.44,79.499 66.86,79.079 U2.2 ; C7.1@65.941,29.574 C7.1 66.363,29.996 U1.20 ; C8.1@66.114,37.276 66.188,37.276 66.59,36.874 C8.1 66.59,36.782 66.992,36.38 67.333,36.38 68.718,34.996 U1.10 ; C29.1 65.915,56.899 64.806,58.008 U6.5 ; C6.1 71.64,22.675 71.64,23.649 72.143,24.152 U1.27 ; C3.2 72.143,44.047 U1.99 ; U1.94 74.643,39.746 v1@76.815,37.574 ; C12.1@83.441,20.549 C12.1 83.291,20.373 83.916,19.748 C12.1@83.916,19.722 ; U1.74 87.563,38.996 87.889,39.322 87.963,39.322 88.365,39.724 C4.2 C4.2@88.688,39.474 ; DS1.2@109.365,50.174 DS1.2@109.415,50.224 ; U6.4@62.896,60.196 64.781,60.196 U6.5 ; U6.9@63.856,61.721 v3(63.856,61.371) U6.9 v3(63.856,60.571) 63.856,60.246 64.268,60.246 64.293,60.221 U6.5
  Top Layer w0.5: J5.1 2.5,10 2.5,19.25 ; J6.1 2.5,19.25 ; J8.1 2.5,30.25 ; J9.1 4.5,43.5 5,44 ; J2.1 3.5,51.25 2.5,51.25 ; J13.1 2.5,61.25 2.5,51.25 ; C22.2@15.392,30.25 C22.2 C21.2 ; C25.2@15.424,50.5 v1(24.5,50.5) ; C18.2 C19.2@20.89,10.448 ; R4.2 13.14,83.499 10.465,80.824 10.465,78.124 8.415,78.124 7.84,77.549 7.84,73.9 14.489,67.25 24.114,67.25 v1(24.84,66.524) ; R4.2@18.19,83.624 18.19,85.825 ; 18.339,85.974 33.99,85.974 34.724,85.239 35.067,85.239 ; C19.2 v1@24.964,10.273 ; C17.2@21.115,26.35 C16.2 8.6,26.35 4.25,22 2.5,22 ; C17.2 21.29,28.374 C21.2@21.29,30.223 ; 21.34,28.424 21.44,28.324 21.465,28.349 v1(24.79,28.349) ; v1(24.84,46.499) 23.502,46.499 23.451,46.55 21.39,46.55 C23.2 7.55,46.55 5,44 ; SW1.3 61.59,38.699 ; v1@61.564,24.75 C2.1 ; C2.1@61.739,27.649 61.739,28.873 ; v1(61.75,44.25) 61.59,44.09 61.59,40.673 ; C9.1@64.438,39.047 64.438,38.973 63.864,38.399 ; 65.515,85.471 65.817,85.774 ; C7.1@65.941,29.574 62.44,29.574 61.739,28.873 ; C8.1@66.114,37.276 64.991,38.399 63.864,38.399 ; v1(68.715,22.524) C6.1 71.489,21.325 72.441,20.373 C12.1 ; C12.1@83.441,20.549 85.415,20.549 88.49,23.624 v1(93.465,23.624) ; C12.1@83.916,19.722 86.014,17.624 R8.2 R6.1 ; C4.2@88.688,39.474 C11.1 v1(91.74,43.324) ; v1(107.75,47.75) 107.75,48.559 DS1.2@109.365,50.174 ; DS1.2@109.415,50.224 DS3.2@109.415,62.224 ; 2.5,19.25 2.5,22 ; 2.5,22 2.5,30.25 ; 2.5,30.25 2.5,44 ; 2.5,44 2.5,51.25 ; 2.5,44 5,44 ; 61.59,38.699 61.739,38.55 C1.2 61.739,28.873 ; 61.59,38.699 61.59,40.673 ; 61.59,40.673 63.864,38.399
  Top Layer w1: 35.79,84.174 44.754,84.174 v2(47.279,81.649) ; v1@61.165,73 61.165,77.182 63.481,79.499 65.515,79.499 65.515,85.471 ; R3.2 65.817,85.774 67.774,87.73 94.534,87.73 v2(100.672,81.591)
  Bottom Layer w0.254: v1(24.84,66.524) v1@24.99,66.374 ; v1(107.75,47.75) 113.5,47.75 115,46.25 115,42.5 J7.2
  Bottom Layer w0.5: 61.69,52.149 61.69,44.31 v1(61.75,44.25) ; v1(68.715,22.524) 63.79,22.524 v1(61.565,24.749) 61.565,12.099 H4.2 H4.1 ; 74.365,52.274 74.365,46.249 v1(72.59,44.474) 76.865,40.199 v1(76.865,37.624) ; v1@91.79,43.299 96.915,43.299 ; v1(93.465,23.624) 96.915,27.074 96.915,43.299 ; v1(107.75,47.75) 103.299,43.299 96.915,43.299
  Bottom Layer w1: v1(24.84,66.524) 40.99,66.524 ; v1(24.99,10.299) v1@24.99,66.374 ; 44.265,73.124 44.265,78.634 v2(47.279,81.649) ; 76.765,52.724 82.365,52.724 86.215,48.874 ; J12.8@90.565,59.774 90.565,53.224 86.215,48.874 ; v1@91.79,43.299 86.215,48.874
  other v1: 54.5,56 68.415,56.024 59.265,56.924 63.1,62.4 61.25,73
NetC1_1: C1.1 J12.7 SW1.1 SW1.2 U1.14 | length 71.5
  Top Layer w0.254: SW1.2 SW1.1 SW1.1@52.69,33.899 ; v1@67.39,32.996 U1.14 ; v1(86.415,45.349) 92.715,51.649 92.715,60.144 J12.7
  Bottom Layer w0.254: v1(52.865,33.749) 52.915,33.699 v1(64.04,33.699) 64.84,32.899 v1(67.715,32.899) 73.99,32.899 v1@86.29,45.199
NetC2_2: C2.2 U1.21 U1.22 | length 10
  Top Layer w0.254: C2.2 63.291,27.549 66.265,27.549 67.712,28.996 ; U1.22 67.712,28.996 ; U1.21 68.212,29.496 67.712,28.996
NetC11_2: C11.2 U1.73 | length 7.1
  Top Layer w0.254: U1.73 87.543,38.496 88.69,37.349 91.416,37.349 C11.2
NetC12_2: C12.2 U1.49 | length 3.8
  Top Layer w0.254: U1.49 83.143,22.296 C12.2
NetDS1_1: DS1.1 R9.1 | length 4.6
  Top Layer w0.254: R9.1@103.69,49.224 R9.1 106.915,49.224 DS1.1@107.915,50.224
NetDS2_1: DS2.1 R10.1 | length 4.6
  Top Layer w0.254: R10.1@103.69,55.224 106.915,55.224 DS2.1@107.915,56.224
NetDS3_1: DS3.1 R11.1 | length 4.6
  Top Layer w0.254: R11.1@103.69,61.224 106.915,61.224 DS3.1@107.915,62.224
NetF1_1: F1.1 F1.3 J3.2 | length 81.8
  Top Layer w1: F1.3 F1.1 52.985,64.985 56.75,68.75 56.75,83.75 63,90 95.799,90 v2(104.208,81.591)
NetH1_1: H1.1 R1.2 | length 6.9
  Top Layer w0.254: H1.1 83.39,82.683 R1.2
NetH1_2: H1.2 J3.5 U2.6 | length 62
  Top Layer w0.254: U2.6 72.665,77.809 72.665,76.174 73.49,75.349 100.194,75.349 102.44,77.595 v2(102.44,79.824)
  Bottom Layer w0.254: H1.2 83.709,79.824 v2(102.44,79.824)
NetH2_1: H2.1 R2.2 | length 7.1
  Bottom Layer w0.254: H2.1 31.765,80.764 v1@31.765,77.574
  other v1: 31.515,77.399
NetH2_2: H2.2 J4.5 U3.6 | length 44.2
  Top Layer w0.254: U3.6 18.19,76.769 18.19,74.724 18.49,74.424 23.615,74.424 v1(24.34,75.149) ; H2.2 30.108,79.881 v2(49.047,79.881)
  Bottom Layer w0.254: v1(24.34,75.149) 24.34,81.349 H2.2
NetH3_1: H3.1 U1.23 | length 23.7
  Top Layer w0.254: v1(65,20.5) 65.14,20.64 65.14,25.374 68.262,28.496 U1.23
  Bottom Layer w0.254: v1(65,20.5) 65,16.673 H3.1
NetH3_2: H3.2 U1.24 | length 18.6
  Top Layer w0.254: v1(67.25,20.5) 67.065,20.685 67.065,26.246 68.814,27.996 U1.24
  Bottom Layer w0.254: v1(67.25,20.5) 67.25,16.963 H3.2
NetJ2_2: J2.2 U7.12 U7.13 | length 17.8
  Top Layer w0.254: U7.13 U7.12
  Top Layer w0.5: J2.2 7.25,50 7.25,52.5 11.46,56.71 U7.13
NetJ3_4: J3.4 R1.1 U2.7 | length 29.1
  Top Layer w0.254: U2.7 76.993,79.079 77.773,78.299 R1.1 80.34,76.813 80.954,76.199 92.056,76.199 93.913,78.056 v2(100.672,78.056)
NetJ4_4: J4.4 R2.1 U3.7 | length 30.9
  Top Layer w0.254: U3.7 27.425,78.039 R2.1 27.965,75.849 29.515,74.299 43.465,74.299 v2(47.279,78.113)
NetJ5_2: J5.2 U4.12 U4.13 | length 20.7
  Top Layer w0.254: U4.13 U4.12
  Top Layer w0.5: J5.2 8.25,6.75 8.25,11.75 12.294,15.794 U4.13
NetJ6_2: J6.2 U4.9 U4.10 | length 14.7
  Top Layer w0.254: U4.10 U4.9
  Top Layer w0.5: J6.2 9.854,19.604 U4.10
NetJ7_1: J7.1 U1.8 | length 56.2
  Top Layer w0.254: U1.8 72.254,35.996 73.208,35.042 77.458,35.042 77.5,35 v1(78.75,35) ; v1(88.25,44) 90.25,46 91.75,46 91.911,45.839 92.661,45.839 v1(92.75,45.75) ; J7.1 v1(112,50.25)
  Bottom Layer w0.254: v1(78.75,35) 87.25,43.5 87.556,43.806 88.056,43.806 v1(88.25,44) ; v1(92.75,45.75) 98.25,45.75 104.5,52 110.5,52 112,50.5 v1(112,50.25)
NetJ8_2: J8.2 U5.12 U5.13 | length 18.4
  Top Layer w0.254: U5.13 U5.12
  Top Layer w0.5: J8.2 7.75,28.5 7.75,31.25 12.294,35.794 U5.13
NetJ9_2: J9.2 U5.9 U5.10 | length 14.4
  Top Layer w0.254: U5.10 U5.9
  Top Layer w0.5: J9.2 9.124,40.874 U5.9
NetJ10_1: J10.1 U1.31 | length 41.3
  Top Layer w0.254: U1.31 74.143,27.402 v1@76.527,29.786 ; v1(92.665,30.549) 110.29,30.549 J10.1@111.84,28.999
  Bottom Layer w0.254: v1@76.64,29.599 78.09,31.049 91.815,31.049 v1@92.415,30.449
  other v1: 76.515,29.799
NetJ10_2: J10.2 U1.40 | length 40
  Top Layer w0.254: U1.40 78.643,27.352 78.665,27.374 v1(78.665,32.299) ; v1(92.565,32.474) 110.315,32.474 J10.2@111.84,33.999
  Bottom Layer w0.254: v1(78.665,32.299) v1@92.34,32.299
NetJ11_1: J11.1 R5.1 | length 6.7
  Top Layer w0.254: R5.1 110.465,11.124 J11.1
NetJ11_2: J11.2 R7.1 | length 6.2
  Top Layer w0.254: R7.1 106.126,17.499 J11.2
NetJ12_1: J12.1 U1.72 | length 45.2
  Top Layer w0.254: U1.72 86.468,37.996 88.665,35.799 93.29,35.799 94.577,37.086 94.577,46.461 v1(92.89,48.149) ; v1(87.715,53.824) 90.265,51.274 90.265,51.024 v1(90.497,50.791)
  Bottom Layer w0.254: J12.1 81.08,62.314 80.665,61.899 80.665,58.374 85.215,53.824 v1(87.715,53.824) ; v1(90.497,50.791) 92.89,48.399 v1(92.89,48.149)
NetJ12_3: J12.3 U1.76 | length 30.4
  Top Layer w0.254: U1.76 83.643,43.846 81.74,45.749 81.74,56.549 80.765,57.524 80.765,62.899 82.715,64.849 84.39,64.849 85.465,63.774 J12.3
NetJ12_5: J12.5 U1.89 | length 35.9
  Top Layer w0.254: U1.89 77.143,43.752 79.115,45.724 79.115,62.699 82.64,66.224 86.64,66.224 88.005,64.859 J12.5
NetJ13_2: J13.2 U7.9 U7.10 | length 13.3
  Top Layer w0.254: U7.10 U7.9
  Top Layer w0.5: J13.2 6.77,60.52 U7.10
NetL1_1: L1.1 U6.7 | length 4.4
  Top Layer w0.254: U6.7 65.781,61.221 66.915,62.355 L1.1
NetR3_1: R3.1 U2.8 | length 6.7
  Top Layer w0.254: R3.1 72.815,81.022 73.488,80.349 U2.8
NetR4_1: R4.1 U3.8 | length 4.4
  Top Layer w0.254: U3.8 20.915,79.734 R4.1
NetR5_2: R5.2 R6.2 U1.83 | length 62.3
  Top Layer w0.254: v1@80.14,30.399 80.143,30.402 U1.83 ; R6.2 101.081,7.624 102.701,9.243 R5.2
  Bottom Layer w0.254: v1(80.04,29.974) 74,23.934 74,14 80.801,7.199 v1(95.315,7.199)
NetR7_2: R7.2 R8.1 U1.81 | length 60.2
  Top Layer w0.254: v1@81.143,28.649 U1.81 ; R8.1 100.92,20.624 102.701,18.843 R7.2
  Bottom Layer w0.254: v1(81.39,28.574) 80.074,28.574 75.25,23.75 75.25,17.5 79,13.75 83.716,13.75 90.765,20.799 v1(95.24,20.799)
NetR9_2: R9.2 U1.55 | length 30.4
  Top Layer w0.254: U1.55 87.012,29.496 91.086,33.57 94.811,33.57 v1(98.49,37.249) ; v1(101.215,41.624) 101.215,44.934 101.397,45.116 v1(101.04,45.474) 101.514,45.474 101.64,45.599 101.64,48.899 R9.2
  Bottom Layer w0.254: v1(98.49,37.249) 101.215,39.974 v1(101.215,41.624)
NetR10_2: R10.2 U1.57 | length 40.4
  Top Layer w0.254: U1.57 86.903,30.496 90.64,34.232 90.64,34.324 94.09,34.324 98.59,38.824 101.057,38.824 v1(102.596,37.285) 102.596,55.224 R10.2@101.64,55.224
NetR11_2: R11.2 U1.59 | length 39.5
  Top Layer w0.254: U1.59 86.837,31.496 89.886,34.545 89.886,34.636 90.327,35.078 93.844,35.078 95.99,37.224 95.99,46.96 v1(98.126,49.096) 98.126,55.386 101.64,58.9 R11.2@101.64,61.224
NetU1_1: U1.1 U5.3 | length 56.5
  Top Layer w0.254: U5.3 33.08,37.064 41.266,45.25 v1(65,45.25) ; v1(68.29,42.849) 68.89,42.849 70.043,41.696 U1.1
  Bottom Layer w0.254: v1(65,45.25) 66.5,45.25 68.29,43.46 v1(68.29,42.849)
NetU1_3: U1.3 U5.5 | length 60.7
  Top Layer w0.254: U5.5 30.32,39.604 33.966,43.25 v1(35.75,43.25) ; U1.3 73.068,38.496 v1@73.665,37.899
  Bottom Layer w0.254: v1(35.75,43.25) 36.916,43.25 57.666,43.25 65.93,43.25 68.506,40.674 71.365,40.674 v1(74.09,37.949)
NetU1_15: U1.15 U4.3 | length 62.3
  Top Layer w0.254: U4.3 21.03,17.024 28.49,17.024 32.015,20.549 v1(32.015,22.474) ; U1.15@70.04,32.499 U1.15 71.568,32.496 v1@72.79,31.274
  Bottom Layer w0.254: v1@32.24,22.574 41.69,22.574 48.74,29.624 67.865,29.624 69.765,31.524 v1(73.19,31.524)
NetU1_17: U1.17 U4.5 | length 59.8
  Top Layer w0.254: 21.771,19.604 U4.5 20.995,19.599 v1(27.265,19.599) ; U1.17 70.052,31.487 71.177,31.487 v1@72.715,29.949
  Bottom Layer w0.254: v1@27.54,19.599 44.365,19.599 51.54,26.774 69.865,26.774 v1(72.765,29.674)
NetU1_42: U1.42 U7.3 | length 94
  Top Layer w0.254: U7.3 26.02,57.98 30,54 v1(30,47.25) ; v1(33.125,34.25) 33.25,34.25 50.25,17.25 v1(77.5,17.25) ; v1@76.75,23 78,24.25 79.25,24.25 79.643,24.643 U1.42
  Bottom Layer w0.254: v1(30,47.25) 30,37.625 33.25,34.375 v1(33.125,34.25) ; v1(76.5,23) 76.5,18.25 v1@77.25,17.5
NetU1_44: U1.44 U7.5 | length 107.4
  Top Layer w0.254: U7.5 26.48,60.52 32.25,54.75 32.25,47.25 28.25,43.25 v1(28.25,42.25) ; v1(28.25,34.25) 28.444,34.056 28.444,33.556 46,16 v1(80.5,16) ; v1@79,23 v1(79.25,23) 79.5,23 80.643,24.143 U1.44
  Bottom Layer w0.254: v1@28.111,42.5 28.25,42.361 v1(28.25,42.25) v1(28.25,34.25) ; v1(79.25,23) 79.25,19 80.5,17.75 v1@80.5,16.25
NetU1_51: U1.51 U3.4 | length 194.5
  Top Layer w0.254: v1(13.965,73.024) 13.965,74.624 14.283,74.941 14.283,75.301 14.481,75.499 U3.4 ; U1.51 97.443,27.496 v1@98.365,26.574
  Bottom Layer w0.254: v1@13.765,72.649 9.29,68.174 9.29,9.624 15.815,3.099 95.065,3.099 98.59,6.624 v1(98.59,26.274)
NetU1_52: U1.52 U3.1 | length 213.2
  Top Layer w0.254: v1(12.59,80.399) 13.68,79.309 U3.1 ; U1.52 86.937,27.996 87.915,28.974 98.59,28.974 v1@99.715,27.849
  Bottom Layer w0.254: v1@12.29,80.499 10.24,80.499 6.54,76.799 6.54,9.449 14.265,1.724 96.44,1.724 100.04,5.324 v1(100.04,27.699)
NetU1_95: U1.95 U2.4 | length 49.1
  Top Layer w0.254: v1(67.215,75.374) 67.215,75.412 67.29,75.487 67.553,75.224 68.54,75.224 68.54,76.539 U2.4 ; U1.95 74.143,42.466 78.25,46.574 v1(78.25,73.75)
  Bottom Layer w0.254: v1(67.215,75.374) 76.626,75.374 v1(78.25,73.75)
NetU1_96: U1.96 U2.1 | length 48.7
  Top Layer w0.254: U2.1 68.44,80.349 68.44,81.324 71.44,81.324 71.44,74.649 77.49,68.599 77.49,46.624 73.643,42.777 U1.96
VCC_MCU: C3.1 C4.1 C5.1 C6.2 C7.2 C8.2 C9.2 C14.1 C15.1 C29.2 J12.2 L1.2 U1.6 U1.11 U1.19 U1.28 U1.50 U1.75 U1.100 U2.3 U3.3 U6.6 | length 257.5
  Top Layer w0.254: C15.1@10.215,76.524 10.465,76.774 10.47,76.769 U3.3 ; U6.6 65.408,60.721 66.43,59.699 C29.2 ; C14.1@65.515,78.149 66.985,78.149 67.75,77.809 U2.3 ; C7.2 66.166,31.299 67.515,31.299 68.318,30.496 U1.19 ; C9.2 66.701,39.313 v1(66.701,38.687) 68.393,36.996 U1.6 ; C9.2@66.59,39.473 66.59,42.924 67.84,44.174 C3.1 70.364,42.375 71.261,41.478 71.622,41.478 71.643,41.457 U1.100 ; 67.242,34.496 U1.11 ; L1.2@69.03,64.199 L1.2 ; U1.28 72.643,24.146 73.141,23.648 C6.2 ; 72.84,59.699 72.865,59.674 ; U1.50 87.719,25.896 87.764,25.851 87.838,25.851 88.24,25.449 C5.1 ; U1.75 85.604,39.496 85.625,39.517 85.625,39.878 87.197,41.45 87.939,41.45 C4.1
  Top Layer w0.5: C15.1@10.215,76.524 10.215,74.124 14.365,69.974 29.64,69.974 32.865,66.749 32.865,58.399 42.565,48.699 72.865,48.699 ; C14.1@65.515,78.149 65.515,70.674 69.03,67.159 ; C7.2 66.09,33.174 66.24,33.324 v1@66.24,34.449 ; C29.2 72.84,59.699 ; L1.2@69.03,64.199 69.03,67.159 ; C3.1 70.364,46.198 72.865,48.699 ; C6.2 74.414,21.25 80.25,21.25 v1(80.75,21.75) ; v1(76.015,48.699) 72.865,48.699 ; J12.2 83.19,59.509 83.19,48.974 v1(82.94,48.724) 82.94,46.449 C4.1@87.939,41.45 ; 69.03,67.159 72.865,63.324 72.865,59.674 72.865,48.699
  Bottom Layer w0.254: v1(66.565,34.449) v1@66.565,38.474
  Bottom Layer w0.5: v1(76.015,48.699) 82.915,48.699 v1(82.94,48.724) ; v1(80.75,21.75) 80.916,21.75 84.79,25.624 v1(88.815,25.624) ; v1@88.815,25.399 92.69,25.399 95.965,28.674 95.965,39.399 94.165,41.199 89.54,41.199 v1(88.865,41.874)
pads on no net: J3.1 J4.1 J4.2 J12.4 J12.6 U1.2 U1.4 U1.5 U1.7 U1.9 U1.12 U1.13 U1.16 U1.18 U1.25 U1.26 U1.29 U1.30 U1.32 U1.33 U1.34 U1.35 U1.36 U1.37 U1.38 U1.39 U1.41 U1.43 U1.45 U1.46 U1.47 U1.48 U1.53 U1.54 U1.56 U1.58 U1.60 U1.61 U1.62 U1.63 U1.64 U1.65 U1.66 U1.67 U1.68 U1.69 U1.70 U1.71 U1.77 U1.78 U1.79 U1.80 U1.82 U1.84 U1.85 U1.86 U1.87 U1.88 U1.90 U1.91 U1.92 U1.93 U1.97 U1.98 U2.5 U3.5 U4.2 U4.4 U4.6 U4.11 U5.2 U5.4 U5.6 U5.11 U7.2 U7.4 U7.6 U7.11
copper on no net:
  other v2: 104.208,78.056 50.815,78.113 50.815,81.649

## Polygon pours and split planes (outlines as drawn)
GND on Bottom Layer "GND" (solid, pour order 8): 34.765,49.874 28.865,49.874 28.865,69.675 cw(c33.593,69.675) 32.494,74.274 75.725,74.274 cw(c75.725,71.734) 78.265,71.734 78.265,54.364 cw(c74.908,53.231) 76.04,49.874 35.393,49.874 cw(c35.079,50.631)
no net on Mechanical 15 (solid): 23.116,32.913

## Silkscreen, mask and mechanical layers (free items; w line width, h text height)
Top Overlay:
  drawing of 75 lines, arcs and shapes, not listed
  text "+12 V" at 58.75,87 h1.52
  text "CAN 2" at 33.7,71.1 h1.52
  text "CAN 1" at 102.56,67.05 h1.52
  text "GND" at 62.75,67 h1.52
  text "SWO" at 88.89,64.374 h1.52 r90
  text "NRST" at 91.59,64.374 h1.52 r90
  text "SWDCLK" at 86.14,64.249 h1.52 r90
  text "SWDIO" at 83.515,64.224 h1.52 r90
  text "GND" at 91.465,53.774 h1.52 r90
  text "VCC" at 83.59,53.649 h1.52 r90
  text "3.3V PWM" at 103.34,23.699 h1.52
  text "UART RX" at 74.065,12.624 h1.52
  text "UART TX" at 74.115,9.549 h1.52
  text "5V IN" at 106.34,6.799 h1.52
  text "GND" at 72.015,6.099 h1.52
  text "Designed by Matt Thimsen" at 35.843,4.312 h0.64
  text "11/14/19 Revision II" at 35.781,2.573 h0.64